# Altium PCB AASTM32-PCB.PcbDoc
Units mm, origin at the board's own origin, x right, y up, seen from the top; angles counter-clockwise.
Board outline 41.6 x 25 mm, 2 copper layers (Top Layer, Bottom Layer), stack 1.671 mm thick; 31 components, 26 nets, 141 pads, 71 vias.
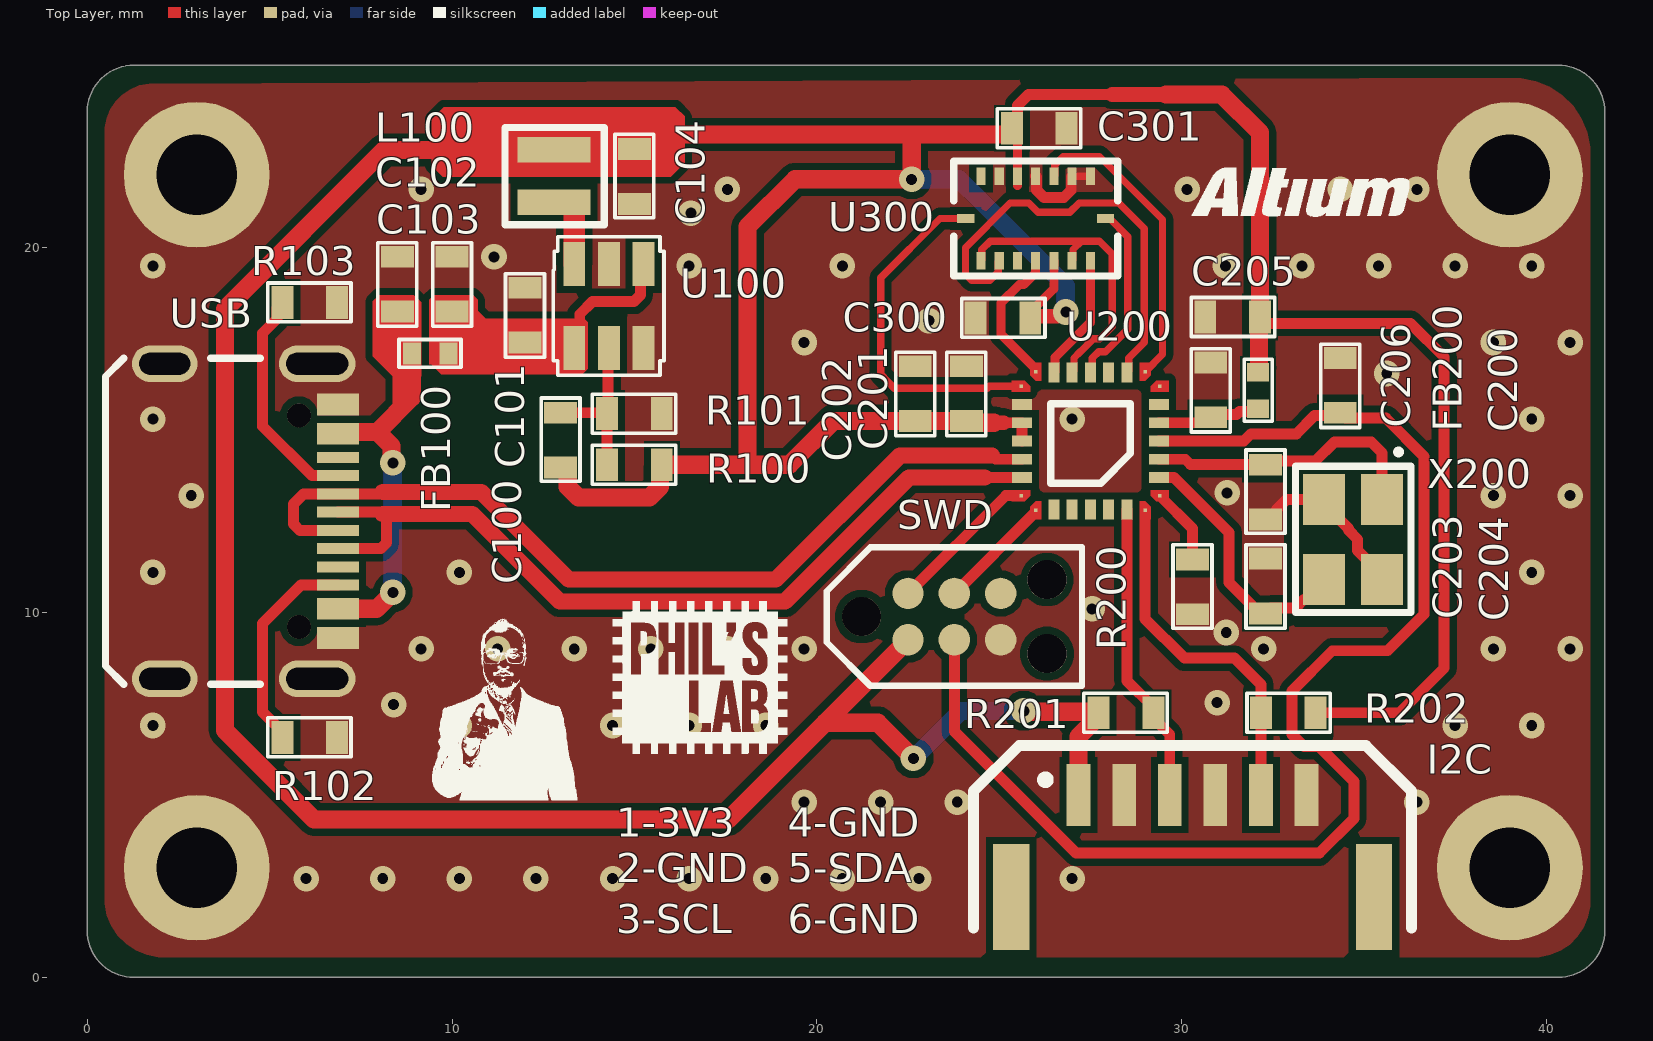
[diagram p0: Top Layer view]
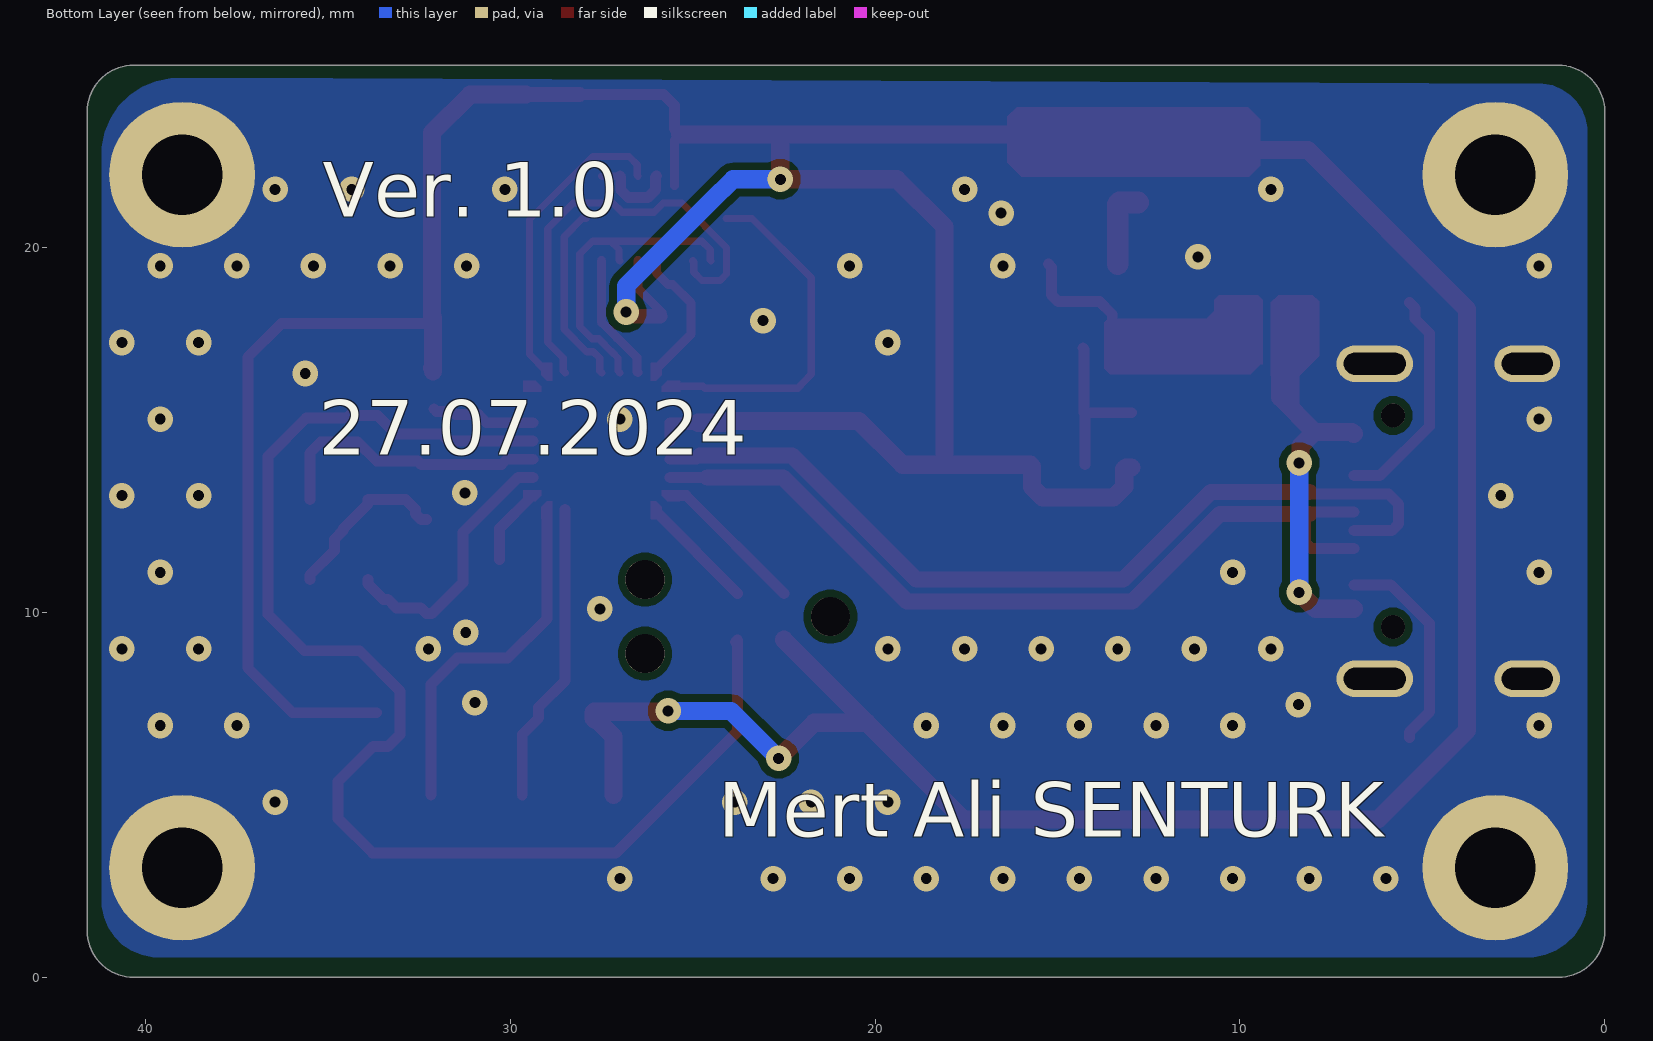
[diagram p1: Bottom Layer view, seen from below]
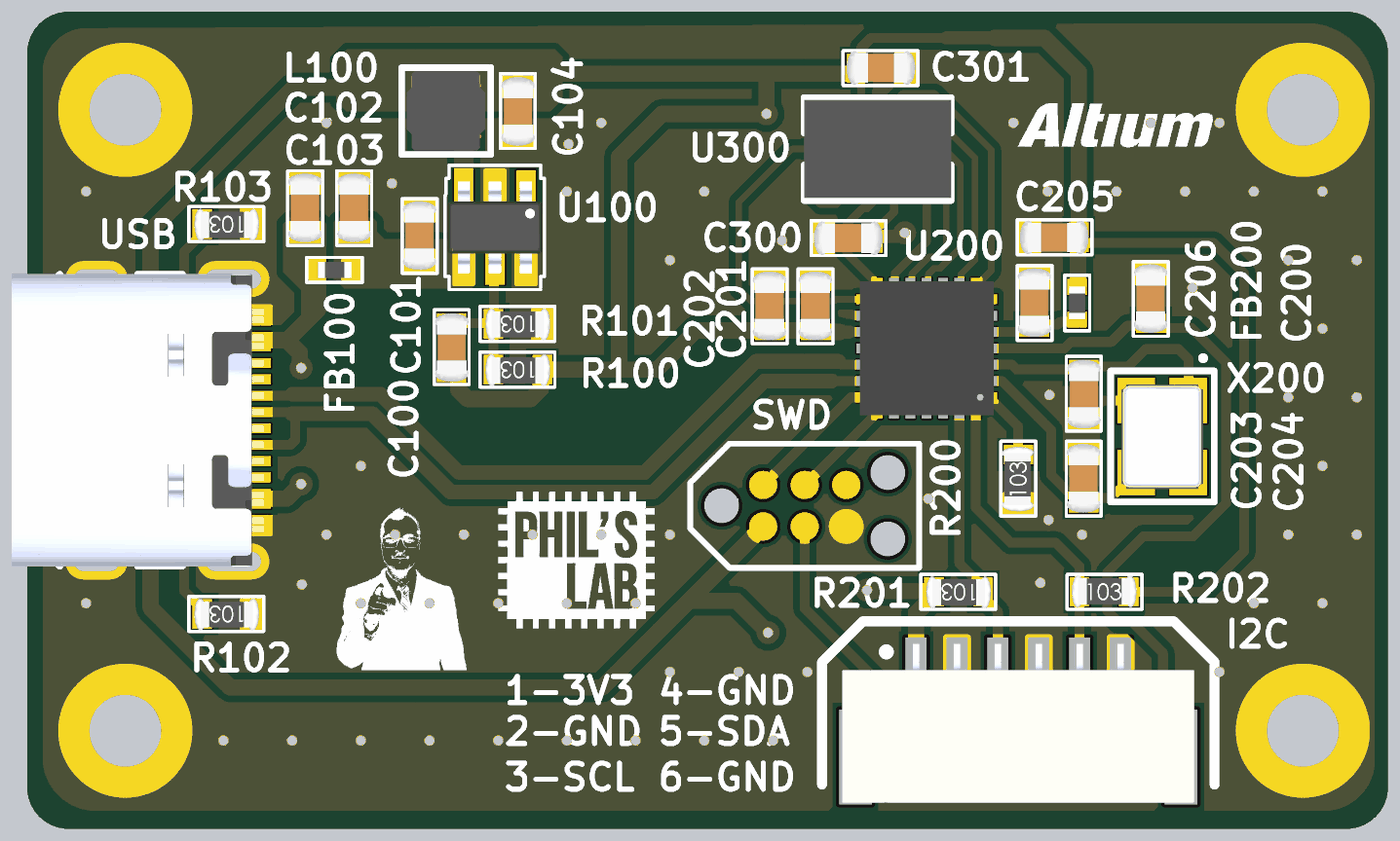
[diagram p2: 3D render of the assembled board from above, using the file's embedded part models]

## Layer stack, top to bottom
Top Solder: solder mask 0.0102, Solder Resist, Dk 3.5
Top Layer: signal copper 0.0356
Dielectric 1: dielectric 1.6, FR-4, Dk 4.6
Bottom Layer: signal copper 0.0356
Bottom Solder: solder mask 0.0102, Solder Resist, Dk 3.5

## Board outline
0,1.27 ccw(c1.27,1.27) 1.27,0 40.33,0 ccw(c40.33,1.27) 41.6,1.27 41.6,23.73 ccw(c40.33,23.73) 40.33,25 33.73,25 1.27,25 ccw(c1.27,23.73) 0,23.73

## Design rules (kind name [scope] priority, off if disabled: settings)
Clearance [All] p1: gap=0.2 ignorepadtopadclearanceinfootprint=TRUE except(0: Arc-Hole Track-Hole SMDPad-Hole THPad-Hole Via-Hole Fill-Hole Poly-Hole Region-Hole Text-Hole; 0.152: Arc-Arc Arc-Track Track-Track; 0.3: Arc-THPad Track-THPad SMDPad-THPad THPad-THPad)
DiffPairsRouting [All] p1: maxlimit=0.152 minlimit=0.152 mostfreqgap=0.152 toplayer_minwidth=0.45 toplayer_maxwidth=0.45 toplayer_prefwidth=0.45 bottomlayer_minwidth=0.45 bottomlayer_maxwidth=0.45 bottomlayer_prefwidth=0.45 impedanceprofiledriven=TRUE impedanceprofileid={2F64BD85-8650-447B-8986-7344422E5D30} impedanceprofilevalue=90.000000 maxuncoupledlength=12.7
PolygonConnect [All] p1: connectstyle=Direct reliefconductorwidth=0.254 reliefentries=4 polygonreliefangle="90 Angle" airgapwidth=0.254
RoutingVias [All] p1: holewidth=0.3 width=0.7 viastyle="Through Hole" minholewidth=0.25 minwidth=0.6 maxholewidth=0.3 maxwidth=0.7
ShortCircuit [All] p1: allowed=TRUE
SolderMaskExpansion [All] p1: expansion=0.102 istentingtop=FALSE
UnRoutedNet [All] p1: checkbadconnections=TRUE
Width [All] p1: maxlimit=1 minlimit=0.15 preferedwidth=0.3
27 further rules are at their usual default settings.

## Classes and differential pairs
differential pair class USB90: USB
differential pair USB: +USB_P -USB_N

## Components (designator, comment, footprint, x,y, rotation, side; value= is the part's Value field where it differs from the comment)
C100 "22pF" "0603 CAP" 12.975,14.725 r90 top value=4.7uF
C101 "4u7F" "0603 CAP" 12,18.15 r270 top value=4.7uF
C102 "100nF" "0603 CAP" 8.5,19 r270 top value=4.7uF
C103 "100nF" "0603 CAP" 10,19 r270 top value=4.7uF
C104 "4u7F" "0603 CAP" 15,21.95 r90 top value=4.7uF
C200 "100nF" "0603 CAP" 34.35,16.225 r270 top value=4.7uF
C201 "100nF" "0603 CAP" 24.1,16 r270 top value=4.7uF
C202 "100nF" "0603 CAP" 22.7,16 r270 top value=4.7uF
C203 "10pF" "0603 CAP" 32.3,13.3 r90 top value=4.7uF
C204 "10pF" "0603 CAP" 32.3,10.724 r270 top value=4.7uF
C205 "100nF" "0603 CAP" 31.398,18.1 r0 top value=4.7uF
C206 "100nF" "0603 CAP" 30.8,16.1 r270 top value=4.7uF
C300 "100nF" "0603 CAP" 25.1,18.075 r0 top value=4.7uF
C301 "100nF" "0603 CAP" 26.1,23.275 r180 top value=4.7uF
FB100 "120R" "0402 RES" 9.4,17.1 r0 top
FB200 "120R" "0402 RES" 32.1,16.083 r270 top
I2C "SM06B-GHS-TB" SM06B-GHS-TB 30.3,3.6 r0 top (schematic designator J300)
L100 "10uH" NRH2412 12.8,21.965 r90 top
R100 "887k" "0603 RES" 15,14.05 r180 top
R101 "280k" "0603 RES" 15,15.45 r180 top
R102 "5k1" "0603 RES" 6.1,6.575 r180 top
R103 "5k1" "0603 RES" 6.1,18.5 r180 top
R200 "5k1" "0603 RES" 30.3,10.7 r90 top
R201 "5k1" "0603 RES" 28.475,7.25 r180 top
R202 "5k1" "0603 RES" 32.925,7.25 r0 top
SWD "TC2030-NL" TC2030-NL-FP 23.77,9.885 r0 top (schematic designator J200)
U100 "LTC3405AES6#TRPBF" SOT23-6 14.3,18.4 r180 top
U200 "STM32F042G6U6" UFQFPN28 27.5,14.7 r180 top
U300 "BMI088" "LGA-16 BOSCH" 26,20.8 r0 top
USB "USB4105-GF-A-060" "USB TYPE C GCT 16P" 4.5,12.5 r270 top (schematic designator J100)
X200 "TSX-3225 24.0000MF15X" 3225 34.7,12 r270 top

## Footprints (in the part's own frame and the unit in brackets; to place one, negate y for a bottom-side part, rotate by r counter-clockwise, add the part's x,y. Pads: shape width x height; smd on the part's side, far side on the other; paste and mask are expansions set on the pad)
"0402 RES" [mm]
  rect 0.5x0.6 smd paste-2539.97 mask+0.05: 1(-0.5,0) 2(0.5,0)
  silkscreen extent -0.86,-0.38 0.85,0.38, body extent -0.5,-0.25 0.5,0.25, height 0.35
"0603 CAP" [mm]
  rect 0.6x0.9 smd paste-2539.97 mask+0.05: 1(-0.75,0) 2(0.75,0)
  silkscreen extent -1.13,-0.53 1.16,0.53, body extent -1.05,-0.52 1.05,0.51, height 0.8
"0603 RES" [mm]
  rect 0.6x0.9 smd paste-2539.97 mask+0.05: 1(-0.75,0) 2(0.75,0)
  silkscreen extent -1.13,-0.53 1.16,0.53, body extent -0.99,-0.47 0.99,0.51, height 0.43
3225 [mm] "3.2x2.5"
  rect 1.4x1.15 smd paste-2539.97 mask+0.05: 1(-1.1,0.8) 2(1.1,0.8) 3(1.1,-0.8) 4(-1.1,-0.8)
  silkscreen extent -2.4,-1.58 2,1.59, body extent -1.6,-1.25 1.6,1.25, height 0.6
"LGA-16 BOSCH" [mm]
  rect 0.25x0.475 smd paste-2539.97 mask+0.05: 1(-1.5,1.16) 2(-1,1.16) 3(-0.5,1.16) 4(0,1.16) 5(0.5,1.16) 6(1,1.16) 7(1.5,1.16) 9(1.5,-1.16) 10(1,-1.16) 11(0.5,-1.16) 12(0,-1.16) 13(-0.5,-1.16) 14(-1,-1.16) 15(-1.5,-1.16)
  rect 0.475x0.25 smd paste-2539.97 mask+0.05: 8(1.915,0) 16(-1.915,0)
  silkscreen extent -2.25,-1.58 2.25,1.57, body extent -2.25,-1.5 2.25,1.5, height 1
NRH2412 [mm]
  rect 0.7x2 smd paste-2539.97 mask+0.05: 1(-0.725,0) 2(0.725,0)
  silkscreen extent -1.33,-1.38 1.33,1.35, body extent -1.2,-1.2 1.2,1.2, height 1.2
SM06B-GHS-TB [mm]
  rect 0.65x1.7 smd: 1(-3.125,1.4) 2(-1.875,1.4) 3(-0.625,1.4) 4(0.625,1.4) 5(1.875,1.4) 6(3.125,1.4)
  rect 1x2.9 smd: ""(-4.975,-1.4) ""(4.975,-1.4)
  silkscreen extent -6,-2.25 6,2.75, body extent -5.38,-2.8 5.38,2.05, height 4.26
SOT23-6 [mm] "SOT23-6"
  rect 0.6x1.2 smd paste-2539.97 mask+0.05: 1(-0.95,-1.15) 2(0,-1.15) 3(0.95,-1.15) 4(0.95,1.15) 5(0,1.15) 6(-0.95,1.15)
  silkscreen extent -1.51,-1.9 1.53,1.9, body extent -1.45,-1.4 1.45,1.4, height 1.45
TC2030-NL-FP [mil]
  round 33.98 smd paste-16.99: 1(-50,-25) 2(-50,25) 3(0,-25) 4(0,25) 5(50,-25) 6(50,25)
  round 42.01 hole 42.01 unplated: MH(-100,0) MH(100,-40) MH(100,40)
  silkscreen extent -138,-75 138,75
UFQFPN28 [mm] "UFQFPN28"
  rect 0.1x0.1 smd paste-1 mask+0.102: 1(-1.9,1.5) 7(-1.9,-1.5) 8(-1.5,-1.9) 14(1.5,-1.9) 15(1.9,-1.5) 21(1.9,1.5) 22(1.5,1.9) 28(-1.5,1.9)
  rect 0.55x0.3 smd mask+0.05: 2(-1.875,1) 3(-1.875,0.5) 4(-1.875,0) 5(-1.875,-0.5) 6(-1.875,-1) 16(1.875,-1) 17(1.875,-0.5) 18(1.875,0) 19(1.875,0.5) 20(1.875,1)
  rect 0.3x0.55 smd mask+0.05: 9(-1,-1.875) 10(-0.5,-1.875) 11(0,-1.875) 12(0.5,-1.875) 13(1,-1.875) 23(1,1.875) 24(0.5,1.875) 25(0,1.875) 26(-0.5,1.875) 27(-1,1.875)
  Top Layer region: -1.35,1.65 -1.5,1.65 -1.65,1.8 -1.65,2.15 -1.35,2.15
  Top Layer region: 1.65,1.8 1.5,1.65 1.35,1.65 1.35,2.15 1.65,2.15
  Top Layer region: 2.15,1.35 1.65,1.35 1.65,1.5 1.8,1.65 2.15,1.65
  Top Layer region: 2.15,-1.65 1.8,-1.65 1.65,-1.5 1.65,-1.35 2.15,-1.35
  Top Layer region: 1.65,-1.8 1.65,-2.15 1.35,-2.15 1.35,-1.65 1.5,-1.65
  Top Layer region: -1.35,-2.15 -1.65,-2.15 -1.65,-1.8 -1.5,-1.65 -1.35,-1.65
  Top Layer region: -1.65,-1.5 -1.8,-1.65 -2.15,-1.65 -2.15,-1.35 -1.65,-1.35
  Top Layer region: -1.65,1.5 -1.65,1.35 -2.15,1.35 -2.15,1.65 -1.8,1.65
  silkscreen extent -1.09,-1.02 1.09,1.15, body extent -2.04,-2.04 2.05,2.04, height 0.61
"USB TYPE C GCT 16P" [mm]
  rect 0.6x1.15 smd paste-2539.97 mask+0.05: A1-B12(-3.2,2.378) A4-B9(-2.4,2.378) B1-A12(3.2,2.378) B4-A9(2.4,2.378)
  rect 0.3x1.15 smd paste-2539.97 mask+0.05: A5(-1.25,2.378) A6(-0.25,2.378) A7(0.25,2.378) A8(1.25,2.378) B5(1.75,2.378) B6(0.75,2.378) B7(-0.75,2.378) B8(-1.75,2.378)
  round 0.65 hole 0.65 paste-2539.97 mask+0.05: MH(-2.9,1.303) MH(2.9,1.303)
  oval 1x2.1 hole 0.6 slot 1.7 at 90 deg paste-2539.97 mask+0.05: SH(-4.32,1.803) SH(4.32,1.803)
  oval 1x1.8 hole 0.6 slot 1.4 at 90 deg paste-2539.97 mask+0.05: SH(-4.32,-2.377) SH(4.32,-2.377)
  silkscreen extent -4.47,-4 4.47,0.25, body extent -4.47,-4.98 4.47,2.73, height 3.31

## Part data
C100 C101 C102 C103 C104 C200 C201 C202 C203 C204 C205 C206 C300 C301: library part "0603 4u7 CAP", "Ceramic Capacitor, Multilayer, Ceramic, 25V, 10% +Tol, 10% -Tol, X5R, 15% TC, 4.7uF, Surface Mount, 0603", Capacitor Type=Ceramic, Case=0603, Manufacturer=Samsung, Manufacturer Part Number=CL10A475KA8NQNC, Max Operating Temperature=85°C, Min Operating Temperature=-55°C, Package Shape=Rectangular, Package Style=SMTMeter, Rated DC Voltage (URdc)=25V, Supplier Part Number=1276-1900-1-ND, Temperature Characteristics Code=X5R, Tolerance  (fill in as +-)=10%, Case/Package=0603, Category="Ceramic Capacitors", ComponentLink1Description=https://datasheet.ciiva.com:443/pdfs/VipMasterIC/IC/SEMS/SEMS-S-A0008384515/SEMS-S-A0008873295-1.pdf?src-supplier=IHS+Markit, ComponentLink1URL=https://datasheet.ciiva.com:443/pdfs/VipMasterIC/IC/SEMS/SEMS-S-A0008384515/SEMS-S-A0008873295-1.pdf?src-supplier=IHS+Markit, ComponentLink2Description=https://datasheet.ciiva.com/25787/cl10a475ka8nqnc-25787017.pdf?src-supplier=Digikey, ComponentLink2URL=https://datasheet.ciiva.com/25787/cl10a475ka8nqnc-25787017.pdf?src-supplier=Digikey, Dielectric Material=Ceramic, Height=0.95mm, JESD-609 Code=e3, Length=1.6mm, Mounting Technology="Surface Mount", Multilayer=Yes, Packaging="Tape and Reel", Pins=2, Pricing="1=0,35, 10=0,226, 50=0,1584, 100=0,1279, 500=0,09502, 1000=0,08314 (USD)", Reach SVHC Compliant=Yes, RoHS=Yes, RoHS Compliant=Yes, Stock=1806164, Supplier=Digikey, Terminal Finish=Nickel, Termination=Wraparound, Tolerance (fill in as +-)=10%, Width=0.8mm
FB100 FB200: library part "Ferritte Bead 120R 0402", "Ferrite Chip, 1 Function(s), 0.9A, 2 Pin(s) / BLM15PD121SN1D", Case Code=0402, Clock Frequency=100MHz, Current Rating=900mA, DC Resistance-Max=90mR, Manufacturer=Murata, Manufacturer Part Number=BLM15PD121SN1D, Max Operating Temperature=125°C, Min Operating Temperature=-55°C, Supplier Part Number=490-5203-6-ND, Category="Ferrite Beads and Chips", Channels=1, ComponentLink1Description=https://datasheet.ciiva.com:443/pdfs/VipMasterIC/IC/MURE/MURE-S-A0010009827/MURE-S-A0010009827-1.pdf?src-supplier=IHS+Markit, ComponentLink1URL=https://datasheet.ciiva.com:443/pdfs/VipMasterIC/IC/MURE/MURE-S-A0010009827/MURE-S-A0010009827-1.pdf?src-supplier=IHS+Markit, Construction="Chip Bead", Filter Type="FERRITE CHIP", Height=0.5mm, JESD-609 Code=e3, Length=1mm, Material=Ferrite, Min Frequency=100MHz, Mounting Technology="Surface Mount", Output Impedance=120R, Packaging="Tape and Reel", Pricing="1=0,1, 10=0,068, 25=0,0616, 50=0,0556, 100=0,0408, 250=0,02968, 500=0,0272, 1000=0,02348, 5000=0,01854 (USD)", Reach SVHC Compliant=Yes, RoHS=Yes, RoHS Compliant=Yes, Stock=709858, Supplier=Digikey, Terminal Finish=Nickel, Width=0.5mm
I2C: "Header Connector 6 Position 1.25MM Pitch SMD Horizontal JST GH", Manufacturer=JST, Manufacturer Part Number=SM06B-GHS-TB
L100: library part NRH2412T100MNGH, "Power Inductors - SMD 963-LSXNE2424MKT100M RPLCMT PN 2412 10uH 600mOhms", Manufacturer="TAIYO YUDEN", Manufacturer Part Number=NRH2412T100MNGH
R100 R101: library part "0603 680R RES", Case=0603
R102 R103 R200 R201 R202: library part "0603 10k RES", Case=0603
SWD: "Tag-Connect No-Solder SWD Debug Connector (No Legs) DO NOT PLACE", Manufacturer=Tag-Connect, Manufacturer Part Number=TC2030-NL-FP
U100: "1.5MHz, 300mA Synchronous Step-Down Regulator in ThinSOT", Manufacturer="Analog Devices", Manufacturer Part Number=LTC3405AES6#TRPBF
U200: "ARM®-based 32-bit MCU, up to 32 KB Flash, crystal-less USB FS 2.0, CAN, 9 timers, ADC and comm. interfaces, 2.0 - 3.6 V", Manufacturer=STMicroelectronics, Manufacturer Part Number=STM32F042G6U6
U300: "IMUs - Inertial Measurement Units High Performance Intertial Measurement Unit (IMU) for Drones and Robotics", Manufacturer="Bosch Sensortec", Manufacturer Part Number=BMI088
USB: library part "USB TYPE C 16 PIN GCT", "USB Connectors USB Type C, 2.0 SMT PCB Top Mnt .60mm", Current Rating=5A, Manufacturer=GCT, Voltage Rating=5V, Manufacturer Part Number=USB4105-GF-A-060
X200: library part "TSX-3225 24.0000MF15X-AC3", "Crystals 24MHz 10ppm 9pF-40C +85C"

## Free pads (board coordinates)
  round 4 hole 2.2 paste-2539.97 mask+0.05: MH(3,3) MH(3,22) MH(39,3) MH(39,22)

## Via types
v1: diameter 0.7, hole 0.3, Top Layer to Bottom Layer, tented both sides, 71 vias

## Nets (pads, with @x,y where several pads share a name; then routed paths per layer and width w, separated by ;. In a path a pad name is that pad's centre, name@x,y a point inside that pad or via, vN(x,y) a via of type N, cw(c..) or ccw(c..) an arc to the next point about the centre after c; other vN are vias at no path point)
3V3: C100.1 C104.2 C201.2 C202.2 C205.2 C300.2 C301.2 FB200.1 I2C.1 L100.2 R100.1 R201.2 R202.2 SWD.1 U200.17 U200.18 U300.3 U300.11 | length 136.9
  Top Layer w0.25: C301.2@25.35,23.1 25.5,22.95 25.5,21.7 ; C300.2@25.9,18.125 C300.2 25.85,18.225 26.5,18.875 U300.11 ; v1@26.592,18.125 26.704,18.237 v1(26.826,18.237)
  Top Layer w0.3: 25.125,15.2 U200.17 U200.18 ; C301.2@25.35,23.1 25.5,23.25 25.5,23.9 25.8,24.2 28.1,24.2 ; FB200.1 32.124,16.607 32.174,16.607 32.25,16.683 FB200.1@32.25,16.733 ; C205.2@32.124,18.076 32.275,17.925 36.275,17.925 37.2,17 37.2,8.475 35.975,7.25 R202.2
  Top Layer w0.4: 18.1,14.15 18.2,14.05 ; 22.575,23.1 22.6,23.075 ; 24.85,15.2 25.125,15.2 ; C300.2@25.9,18.125 v1@26.592,18.125 ; 28.1,24.2 29.579,24.2
  Top Layer w0.5: L100.2 12.815,22.675 8.139,22.675 3.775,18.311 3.775,6.764 6.214,4.325 17.575,4.325 20.225,6.975 ; C100.1 13.125,13.975 13.175,13.925 13.175,13.443 13.468,13.15 15.407,13.15 15.7,13.443 15.7,14 R100.1 18.2,14.05 19.25,14.05 20.45,15.25 C202.2 C201.2 24.15,15.2 24.85,15.2 ; C104.2 15.025,22.7 15.425,23.1 22.575,23.1 C301.2@25.35,23.1 ; 18.1,14.15 18.1,20.575 19.4,21.875 v1(22.6,21.875) 22.6,23.075 ; SWD.1 20.225,6.975 ; v1(22.65,6) 21.675,6.975 20.225,6.975 ; v1(25.675,7.3) 25.7,7.275 27.7,7.275 R201.2 27.725,7.1 27.675,7.05 27.625,7.05 27.175,6.6 I2C.1 ; 29.579,24.2 31.1,24.2 32.148,23.152 C205.2 32.124,18.076 FB200.1@32.124,16.607
  Bottom Layer w0.5: v1(22.6,21.875) 23.9,21.875 24.498,21.277 26.826,18.949 v1(26.826,18.237) ; v1(22.65,6) 23.95,7.3 v1(25.675,7.3)
3V3A: C206.2 FB200.2 U200.5 | length 2.9
  Top Layer w0.3: U200.5 30.65,15.2 30.881,15.431 31.506,15.431 31.586,15.511 32.028,15.511 FB200.2
5V: C101.2 C103.2 FB100.2 U100.1 U100.4 | length 3.8
  Top Layer w0.3: U100.4 13.5,17.4 13.5,18.175 13.85,18.525 14.987,18.525 15.163,18.701 15.163,19.463 U100.1
BOOT0: R200.2 U200.1 | length 2.1
  Top Layer w0.3: U200.1 30.3,12.3 R200.2
GND: C101.1 C102.1 C103.1 C104.1 C200.1 C201.1 C202.1 C203.1 C204.1 C205.1 C206.1 C300.1 C301.1 I2C.2 I2C.4 I2C.6 pad.MH R101.1 R102.1 R103.1 R200.1 SWD.5 U100.2 U100.6 U200.16 U300.2 U300.4 U300.6 U300.7 USB.A1-B12 USB.B1-A12 USB.SH X200.2 X200.4 | length 7.2
  Top Layer w0.2: U300.6 U300.7
  Top Layer w0.3: U300.4 26.025,21.935 26.025,21.578 26.23,21.373 26.77,21.373 26.975,21.578 26.975,21.935 U300.6 ; C203.1 32.45,12.55 32.6,12.7 32.6,12.825 32.875,13.1 X200.4 33.9,12.975 34.575,12.3 34.575,12.255 34.825,12.005 34.825,11.7 35.5,11.025 X200.2
  other v1: 6,2.7 8.1,2.7 10.2,2.7 12.3,2.7 14.4,2.7 16.5,2.7 18.6,2.7 20.7,2.7 22.8,2.7 27,2.7 19.65,4.8 21.75,4.8 23.85,4.8 36.45,4.8 1.8,6.9 10.2,6.9 12.3,6.9 14.4,6.9 16.5,6.9 18.6,6.9 37.5,6.9 39.6,6.9 8.4,7.475 30.975,7.525 9.15,9 11.25,9 13.35,9 15.45,9 17.55,9 19.65,9 32.25,9 38.55,9 40.65,9 31.225,9.45 27.55,10.1 1.8,11.1 10.2,11.1 39.6,11.1 2.85,13.2 38.55,13.2 40.65,13.2 31.25,13.275 1.8,15.3 27,15.3 39.6,15.3 35.625,16.55 19.65,17.4 38.55,17.4 40.65,17.4 23.075,18 1.8,19.5 16.5,19.5 20.7,19.5 31.2,19.5 33.3,19.5 35.4,19.5 37.5,19.5 39.6,19.5 11.15,19.75 16.55,20.95 9.15,21.6 17.55,21.6 30.15,21.6 34.35,21.6 36.45,21.6
I2C_SCL: I2C.3 R201.1 U200.27 | length 8.3
  Top Layer w0.3: U200.27 28.5,8.125 29.225,7.4 R201.1 29.225,7.1 29.675,6.65 I2C.3
I2C_SDA: I2C.5 R202.1 U200.28 | length 9.9
  Top Layer w0.3: U200.28 29,9.825 30.075,8.75 31.45,8.75 32.175,8.025 R202.1 I2C.5
IMU_CSB_ACCEL: U200.9 U300.14 | length 12.2
  Top Layer w0.2: U300.14 24.975,19.615 24.975,19.328 24.749,19.103 24.251,19.103 24.075,19.278 24.075,20.002 25.298,21.225 25.808,21.225 26.063,20.97 26.937,20.97 27.192,21.225 28.277,21.225 28.975,20.527 28.975,17.399 28.55,16.974 28.55,16.625 U200.9
IMU_CSB_GYRO: U200.8 U300.5 | length 8.4
  Top Layer w0.2: U300.5 26.525,21.985 26.525,22.272 26.751,22.498 27.749,22.498 29.475,20.772 29.475,17.075 U200.8
IMU_INT1: U200.15 U300.16 | length 9.7
  Top Layer w0.2: U300.16 23.375,20.8 21.75,19.175 21.75,16.526 21.95,16.326 22.126,16.15 24.674,16.15 24.724,16.2 U200.15
IMU_INT2: U200.14 U300.12 | length 3.9
  Top Layer w0.25: U200.14 26,16.675 25.05,17.625 25.05,18.485 25.554,18.989 25.671,18.989 26,19.318 U300.12
IMU_MISO: U200.12 U300.10 U300.15 | length 8.6
  Top Layer w0.2: U300.15 24.525,19.665 24.525,19.952 24.751,20.178 27.251,20.178 ; U200.12 27.05,16.625 27.05,16.974 27.226,17.15 27.227,17.15 27.58,17.502 27.766,17.502 28.1,17.837 28.1,19.827 27.749,20.178 27.251,20.178 ; U300.10 27.025,19.665 27.025,19.952 27.251,20.178
IMU_MOSI: U200.13 U300.9 | length 3.5
  Top Layer w0.25: U200.13 26.525,16.6 26.525,16.985 27.068,17.527 27.071,17.527 27.501,17.957 27.501,18.723 U300.9
IMU_SCK: U200.11 U300.8 | length 5.1
  Top Layer w0.2: U200.11 27.55,16.625 27.55,16.974 27.726,17.15 27.912,17.15 28.525,17.763 28.525,20.303 28.028,20.8 U300.8
NRST: C200.2 SWD.3 U200.4 | length 36.7
  Top Layer w0.3: SWD.3@23.825,9.195 SWD.3 23.77,6.735 27.105,3.4 33.775,3.4 34.725,4.35 34.725,5.37 33.77,6.325 33.355,6.325 33.025,6.655 33.025,7.845 34.13,8.95 35.65,8.95 36.65,9.95 36.65,14.275 35.6,15.325 34.5,15.325 C200.2 34.269,15.394 33.644,15.394 33.148,14.898 31.903,14.898 31.705,14.7 U200.4
OSC_IN: C204.2 U200.2 X200.3 | length 7.3
  Top Layer w0.3: U200.2 29.795,13.7 31.3,12.195 31.3,10.824 32.15,9.974 C204.2 32.45,10.124 33.124,10.124 33.35,10.35 33.475,10.35 33.9,10.775 X200.3
OSC_OUT: C203.2 U200.3 X200.1 | length 7.8
  Top Layer w0.3: U200.3 30.1,14.2 30.25,14.05 32.45,14.05 32.55,14.15 33.665,14.15 34.19,14.675 35.2,14.675 35.5,14.375 X200.1
REG_FB: C100.2 R100.2 R101.2 U100.5 | length 4.5
  Top Layer w0.3: C100.2 14.275,15.475 14.275,17.225 U100.5 ; R100.2 R101.2
REG_SW: L100.1 U100.3 | length 2.2
  Top Layer w0.6: L100.1 13.3,21.24 13.35,21.19 U100.3
SWCLK: SWD.4 U200.22 | length 3.2
  Top Layer w0.3: SWD.4 26,12.75 U200.22
SWDIO: SWD.2 U200.21 | length 4.2
  Top Layer w0.3: SWD.2 25.18,13.2 U200.21
USB_CC1: R103.2 USB.A5 | length 6.3
  Top Layer w0.3: R103.2 5.2,18.35 5.2,18.052 4.803,17.655 4.803,15.105 6.158,13.75 USB.A5
USB_CC2: R102.2 USB.B5 | length 5.9
  Top Layer w0.3: R102.2 5.35,6.725 4.803,7.273 4.803,9.696 5.856,10.75 USB.B5
USB_N: U200.19 USB.A7 USB.B7 | length 24.4
  Top Layer w0.3: USB.A7 6.29,12.25 5.825,12.25 5.65,12.426 5.65,12.975 5.925,13.25 6.377,13.25 8.05,13.25 8.101,13.301 ; 24.802,14.302 24.905,14.2 U200.19
  Top Layer w0.45: 8.101,13.301 10.802,13.301 13.201,10.902 18.877,10.902 22.277,14.302 24.802,14.302
USB_P: U200.20 USB.A6 USB.B6 | length 23.4
  Top Layer w0.3: USB.B6 8.05,11.75 8.2,11.9 8.2,12.6 8.101,12.699 8.05,12.75 USB.A6 ; 24.6,13.7 U200.20
  Top Layer w0.45: 8.101,12.699 10.552,12.699 12.951,10.3 19.127,10.3 22.527,13.7 24.6,13.7
VUSB: C102.2 FB100.1 USB.A4-B9 USB.B4-A9 | length 9.9
  Top Layer w0.5: USB.B4-A9 7.925,10.1 v1(8.375,10.55) ; USB.A4-B9 6.928,14.95 7.95,14.95 ; v1(8.375,14.1) 8.337,14.138 8.337,14.563 7.95,14.95 ; FB100.1 8.9,15.9 7.95,14.95
  Bottom Layer w0.5: v1(8.375,10.55) v1(8.375,14.1)
pads on no net: I2C. SWD.6 SWD.MH U200.6 U200.7 U200.10 U200.23 U200.24 U200.25 U200.26 U300.1 U300.13 USB.A8 USB.B8 USB.MH

## Polygon pours and split planes (outlines as drawn)
GND on Top Layer "GND_L01_P002" (solid, remove dead copper, pour order 2): 1.825,24.5 ccw(c1.825,23.15) 0.475,23.15 0.475,2.175 ccw(c2.1,2.175) 2.1,0.55 39.65,0.55 ccw(c39.65,2.1) 41.2,2.1 41.2,22.55 ccw(c39.1,22.55) 39.1,24.65 34.875,24.65
GND on Bottom Layer "GND_L02_P001" (solid, pour order 1): 1.825,24.5 ccw(c1.825,23.15) 0.475,23.15 0.475,2.175 ccw(c2.1,2.175) 2.1,0.55 39.65,0.55 ccw(c39.65,2.1) 41.2,2.1 41.2,22.55 ccw(c39.1,22.55) 39.1,24.65 34.875,24.65

## Other copper
Top Layer:
  pour cut-out: 32.8,13.975 33.125,14.3 33.125,14.425 36.15,14.425 36.65,13.925 36.65,9.95 36.3,9.6 33.117,9.6 32.8,9.917 32.8,12.15
  region net 5V: 9.375,18.575 9.5,18.7 10.575,18.7 10.7,18.575 10.7,18.275 10.925,18.05 13.375,18.05 13.5,18.175 13.725,17.95 13.725,16.675 13.575,16.525 9.7,16.525 9.425,16.8 9.375,16.8
  region net 3V3: 9.45,23.525 9.775,23.85 16.125,23.85 16.375,23.6 16.375,22.325 16,21.95 9.75,21.95 9.45,22.25
  region net 3V3: 11.65,23 11.85,23.2 15.475,23.2 15.625,23.05 15.625,22.25 15.45,22.075 11.85,22.075 11.65,22.275 11.65,22.375
  region net VUSB: 8.375,16.475 8.375,15.475 8.425,15.425 8.9,15.9 8.9,16.5 8.6,16.8 8.6,16.825
  region net VUSB: 7.825,18.525 8,18.7 8.95,18.7 9.15,18.5 9.15,16.475 8.375,16.475 7.825,17.025 7.825,17.275

## Silkscreen, mask and mechanical layers (free items; w line width, h text height)
Top Overlay:
  drawing of 157 lines, arcs and shapes, not listed
  text "1-3V3" at 14.503,3.853 h0.8
  text "4-GND" at 19.203,3.853 h0.8
  text "2-GND" at 14.503,2.603 h0.8
  text "5-SDA" at 19.203,2.603 h0.8
  text "3-SCL" at 14.503,1.203 h0.8
  text "6-GND" at 19.203,1.203 h0.8
Bottom Overlay:
  text "Ver. 1.0" at 35.15,20.85 h1.5
  text "27.07.2024" at 35.25,14.325 h1.5
  text "Mert Ali SENTURK" at 24.3,3.85 h1.5
Mechanical 1:
  lines w0.2: 0,1.27 ccw(c1.27,1.27) 1.27,0 33.73,0 40.33,0 ccw(c40.33,1.27) 41.6,1.27 41.6,23.73 ccw(c40.33,23.73) 40.33,25 33.73,25 1.27,25 ccw(c1.27,23.73) 0,23.73 0,1.27